# EAGLE board AnalogEx_2RedLedFadeInFadeOutUSB (EAGLE 7.6.0)
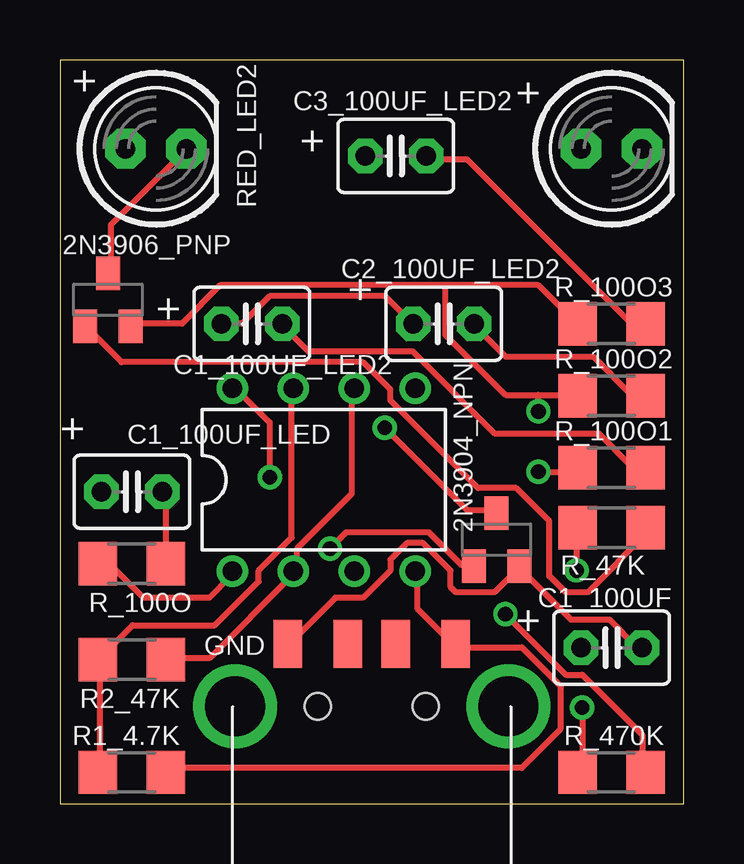
[diagram p0: board, top side]
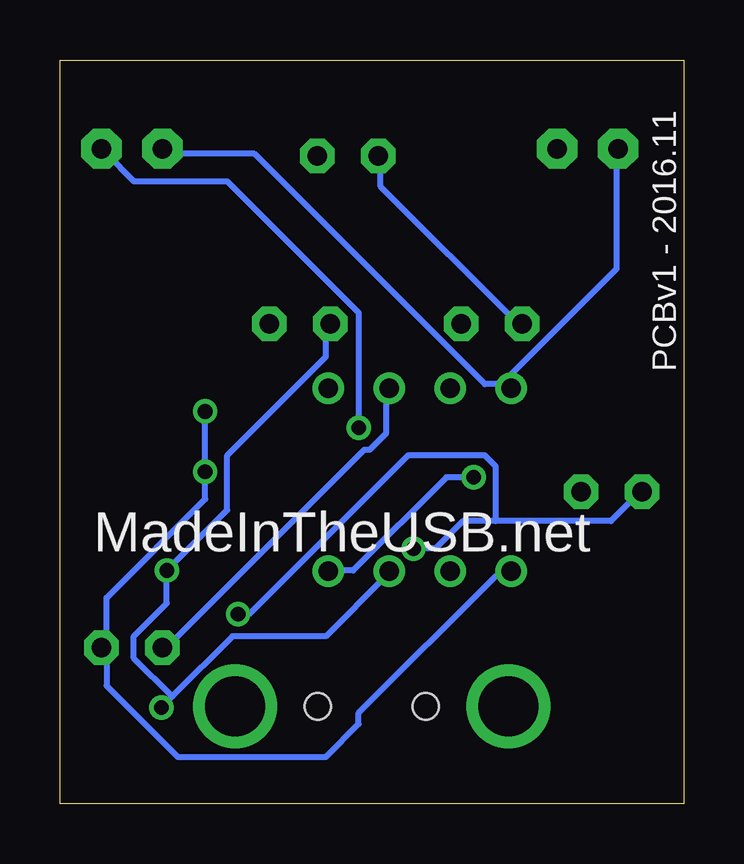
[diagram p1: board, bottom side, seen from below]

Size 26 x 31 mm. Coordinates in mm from the lower left corner, seen from the top.
Outline: 0,0 26,0 26,31 0,31 0,0
Copper layers (1*16): Top 0.035mm / dielectric 1.5mm / Bottom 0.035mm
Design rules "default": minimum track width 10mil, minimum drill 24mil, track to track 8mil, track to pad 8mil, pad to pad 8mil, via to via 8mil, smd to smd 8mil, copper to edge 40mil, drill to drill 8mil, minimum pad ring 10mil, minimum via ring 8mil, stop-mask expansion 4mil, vias tented up to drill 0mil, thermal gap 10mil

## Footprints (pad centres in the part's own frame; a part is rotated, then mirrored left to right if it is on the bottom)
SOT23-BEC = smd 1 x 1.4: B -0.95,-1.1; C 0,1.1; E 0.95,-1.1
C025-030X050 = drill 0.813 pad 1.422 octagon: 1 -1.27,0; 2 1.27,0
DIL08 = drill 0.813 pad 1.27: 1 -3.81,-3.81; 2 -1.27,-3.81; 3 1.27,-3.81; 4 3.81,-3.81; 5 3.81,3.81; 6 1.27,3.81; 7 -1.27,3.81; 8 -3.81,3.81
R1206 = smd 1.6 x 1.803: 1 -1.422,0; 2 1.422,0
LED5MM = drill 0.813 pad 1.676 octagon: A -1.27,0; K 1.27,0
MOLEX_480371000 = smd 1.2 x 2: 1 3.5,2.6; 2 1,2.6; 3 -1,2.6; 4 -3.5,2.6 | drill 2.5: M1 -5.7,0; M2 5.7,0 | hole 1.1: -2.25,0; 2.25,0

## Placement (x,y rotation side)
2N3904_NPN  [SOT23-BEC]  18.2,11 0 top
2N3906_PNP  MMBT3906LT1SMD  [SOT23-BEC]  2,21 0 top
C1_100UF  [C025-030X050]  23,6.5 180 top
C1_100UF_LED  [C025-030X050]  3,13 0 top
C1_100UF_LED2  [C025-030X050]  8,20 0 top
C2_100UF_LED2  [C025-030X050]  16,20 0 top
C3_100UF_LED2  [C025-030X050]  14,27 0 top
IC1  NE555N  [DIL08]  11,13.5 0 top
R1_4.7K  [R1206]  3,1.3 0 top
R2_47K  [R1206]  3,6 180 top
R_47K  [R1206]  23,11.5 180 top
R_100O  [R1206]  3,10 0 top
R_100O1  [R1206]  23,14 0 top
R_100O2  [R1206]  23,17 0 top
R_100O3  [R1206]  23,20 0 top
R_470K  [R1206]  23,1.3 0 top
RED_LED  [LED5MM]  23,27.3 0 top
RED_LED2  [LED5MM]  4,27.3 0 top
X1  USB-A  [MOLEX_480371000]  13,4.05 0 top

## Library data of the parts
2N3904_NPN = transistor
2N3906_PNP = transistor-pnp
C1_100UF C1_100UF_LED C1_100UF_LED2 C2_100UF_LED2 C3_100UF_LED2 R1_4.7K R2_47K R_47K R_100O R_100O1-R_100O3 R_470K RED_LED RED_LED2 X1 = adafruit
IC1 = linear

## Nets
GND: 2N3904_NPN.E 2N3906_PNP.E C1_100UF.1 IC1.1 R_100O1.1 R_100O2.1 R_100O3.1 R_100O.1 X1.4
N$1: IC1.7 R1_4.7K.1 R2_47K.2
N$2: C1_100UF_LED.2 R_100O.2
N$3: 2N3904_NPN.B C1_100UF_LED.1 R_470K.2
N$4: 2N3904_NPN.C RED_LED.K
N$5: 2N3906_PNP.C RED_LED2.K
N$6: 2N3906_PNP.B R_47K.1
N$7: C1_100UF_LED2.2 R_100O1.2
N$9: C3_100UF_LED2.2 R_100O3.2
N$10: C2_100UF_LED2.2 R_100O2.2
THRESHOLD: C1_100UF.2 IC1.2 IC1.6 R2_47K.1
TMR555_OUTPUT: C1_100UF_LED2.1 C2_100UF_LED2.1 C3_100UF_LED2.1 IC1.3 R_47K.2 R_470K.1
VCC: IC1.4 IC1.8 R1_4.7K.2 RED_LED2.A RED_LED.A X1.1

## Tracks (layer width: path | path; a pad name or v marks a point on that pad's centre or on a via)
GND  (via drill 0.61)
  Top 0.254: 16.06,21.6 19.95,21.6 21.55,20 R_100O3.1 | 16.06,21.6 6.69,21.6 5.09,20 3.03,20 2N3906_PNP.E | 19.95,17.03 18.57,17.03 16.06,19.55 16.06,21.6 | 19.95,17.03 21.55,17.03 R_100O2.1 | R_100O.1 1.66,9.95 2.12,9.95 3.49,8.57 6.23,8.57 7.14,9.49 IC1.1 | C1_100UF.1 24.06,6.52 22.92,7.66 21.32,7.66 19.26,9.72 2N3904_NPN.E 19.03,9.72 18.12,8.8 16.52,8.8 16.29,9.03 16.29,9.72 15.14,10.86 14.46,10.86 13.77,10.17 13.77,9.72 12.63,8.57 11.49,8.57 9.66,6.75 X1.4 | v19.95,13.83 21.55,13.83 R_100O1.1 | v19.95,16.35 19.95,17.03
  Bottom 0.254: IC1.1 7.37,9.49 7.83,9.49 13.54,3.77 13.54,3.32 14.92,1.95 21.09,1.95 24.06,4.92 24.06,6.29 C1_100UF.1 24.06,6.52 24.06,8.57 19.95,12.69 v19.95,13.83 v19.95,16.35
N$1
  Top 0.254: R1_4.7K.1 1.66,1.49 1.66,5.83 R2_47K.2 1.66,6.06 3.03,7.43 6.46,7.43 8.29,9.26 8.29,9.72 9.66,11.09 9.66,17.26 IC1.7
N$2
  Top 0.254: R_100O.2 4.4,10.17 4.4,12.92 C1_100UF_LED.2
N$3  (via drill 0.61)
  Top 0.254: v11.26,10.63 11.95,11.32 15.37,11.32 16.75,9.95 17.2,9.95 2N3904_NPN.B | v18.57,7.89 21.09,5.37 21.77,5.37 24.29,2.86 24.29,1.49 R_470K.2
  Bottom 0.254: v11.26,10.63 10.34,10.63 9.2,11.77 7.83,11.77 | 7.83,11.77 3.03,11.77 1.89,12.92 C1_100UF_LED.1 | v18.57,7.89 18.12,7.89 11.49,14.52 8.29,14.52 7.83,14.06 7.83,11.77
N$4  (via drill 0.61)
  Top 0.254: v13.54,15.66 16.97,12.23 18.12,12.23 2N3904_NPN.C
  Bottom 0.254: v13.54,15.66 13.54,20.46 19.03,25.95 22.92,25.95 24.06,27.09 RED_LED.K
N$5
  Top 0.254: 2N3906_PNP.C 2.12,22.29 2.12,24.12 5.09,27.09 RED_LED2.K
N$6
  Top 0.254: 2N3906_PNP.B 1.2,19.77 2.57,18.4 12.63,18.4 13.77,17.26 13.77,16.8 17.43,13.15 19.03,13.15 20.4,11.77 20.4,9.49 21.09,8.8 22,8.8 24.52,11.32 R_47K.1
N$7
  Top 0.254: R_100O1.2 24.29,14.06 23.83,14.06 22.46,15.43 18.12,15.43 14.69,18.86 10.34,18.86 9.43,19.77 C1_100UF_LED2.2
N$9
  Top 0.254: R_100O3.2 24.29,20 23.83,20 16.97,26.86 15.37,26.86 C3_100UF_LED2.2
N$10
  Top 0.254: R_100O2.2 24.29,17.03 23.83,17.03 22.23,18.63 18.57,18.63 17.43,19.77 C2_100UF_LED2.2
THRESHOLD
  Top 0.254: R2_47K.1 4.63,6.06 6.23,6.06 9.66,9.49 IC1.2 9.89,9.72 9.89,10.63 12.17,12.92 12.17,17.26 IC1.6
  Bottom 0.254: C1_100UF.2 21.55,6.52 13.32,14.75 13.09,14.75 12.4,15.43 12.4,17.26 IC1.6
TMR555_OUTPUT  (via drill 0.61)
  Top 0.254: C1_100UF_LED2.1 6.91,20 7.6,20 8.74,21.15 13.54,21.15 14.69,20 C2_100UF_LED2.1 | v21.77,4 21.77,1.49 R_470K.1 | v21.55,9.72 21.55,11.32 R_47K.2
  Bottom 0.254: C3_100UF_LED2.1 12.63,26.86 12.63,25.72 6.91,20 C1_100UF_LED2.1 | 21.32,4.46 18.8,6.97 14.92,6.97 12.4,9.49 IC1.3 | 21.32,4.46 v21.77,4 | 21.32,4.46 22.92,6.06 22.92,6.97 21.55,8.34 v21.55,9.72 19.03,12.23 19.03,14.52 14.92,18.63 14.92,19.77 C2_100UF_LED2.1
VCC  (via drill 0.61)
  Top 0.254: R1_4.7K.2 4.63,1.49 19.26,1.49 20.86,3.09 20.86,4.92 19.26,6.52 16.52,6.52 X1.1 16.29,6.75 14.92,8.12 14.92,9.49 IC1.4 | v8.74,13.6 8.74,15.89 7.37,17.26 IC1.8
  Bottom 0.254: RED_LED2.A 2.8,27.09 2.8,22.29 7.14,17.95 7.14,17.49 IC1.8 7.37,17.49 8.29,17.49 17.89,27.09 21.55,27.09 RED_LED.A | v8.74,13.6 9.89,13.6 13.77,9.72 14.69,9.72 IC1.4

## Text on the board
tNames: + | + | + | + | + | + | + | GND
bNames: PCBv1 - 2016.11 | MadeInTheUSB.net